# EAGLE board oledboard2 (EAGLE 6.5.0)
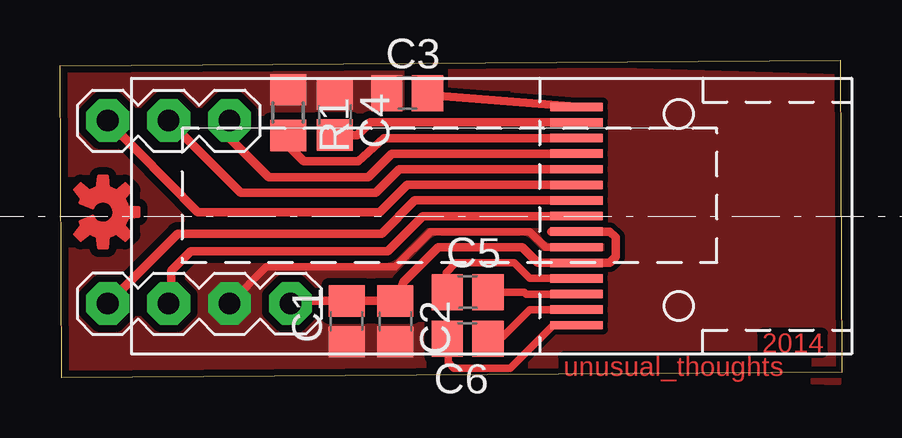
[diagram p0: board, top side]

Size 32.58 x 13.24 mm. Coordinates in mm from the lower left corner, seen from the top.
Outline: 0,13 32.5,13.24 32.58,0.24 0.08,0 0,13
Copper layers (1*16): Top 0.035mm / dielectric 1.5mm / Bottom 0.035mm
Design rules "default *": minimum track width 14mil, minimum drill 24mil, track to track 8mil, track to pad 8mil, pad to pad 8mil, via to via 8mil, smd to smd 8mil, copper to edge 10mil, drill to drill 8mil, minimum pad ring 10mil, minimum via ring 8mil, stop-mask expansion 4mil, vias tented up to drill 0mil, thermal gap 10mil

## Footprints (pad centres in the part's own frame; a part is rotated, then mirrored left to right if it is on the bottom)
C0805 = smd 1.3 x 1.5: 1 -0.85,0; 2 0.85,0
R0805 = smd 1.3 x 1.5: 1 -0.95,0; 2 0.95,0
UG-2832HSWEG04 = smd 2.2 x 0.35: 1 1.535,-4.55; 2 1.535,-3.9; 3 1.535,-3.25; 4 1.535,-2.6; 5 1.535,-1.95; 6 1.535,-1.3; 7 1.535,-0.65; 8 1.535,0; 9 1.535,0.65; 10 1.535,1.3; 11 1.535,1.95; 12 1.535,2.6; 13 1.535,3.25; 14 1.535,3.9; 15 1.535,4.55
CONNECTOR = drill 0.9 pad 1.778 octagon: 1 -2.54,-3.81; 2 -5.08,-3.81; 3 -5.08,3.81; 4 0,-3.81; 5 -2.54,3.81; 6 0,3.81; 7 2.54,-3.81

## Placement (x,y rotation side)
C1  1 uF  [C0805]  11.94,2.36 90 top
C2  1 uF  [C0805]  13.97,2.36 270 top
C3  2.2 uF  [C0805]  14.46,11.86 0 top
C4  2.2 uF  [C0805]  11.46,10.97 270 top
C5  1 uF  [C0805]  16.98,3.58 0 top
C6  1 uF  [C0805]  16.98,1.62 180 top
LOGO1  OSHW.SYMS  [OSHW-LOGO-S]  1.79,6.91 270 top
R1  3.3K  [R0805]  9.51,11.05 270 top
U$1  UG-2832HSWEG04  [UG-2832HSWEG04]  19.99,6.74 0 top
U$6  CONNECTOR  [CONNECTOR]  7.07,6.91 0 top

## Library data of the parts
C1-C6 = resistor
LOGO1 U$1 U$6 = OLED
R1 = rcl

## Nets
3.3V: C1.2 C2.1 U$1.5 U$1.7 U$6.7
GND: C1.1 C2.2 C3.1 C4.1 R1.1 U$1.6 U$6.4
N$1: C5.1 U$1.4
N$2: C5.2 U$1.3
N$3: C6.1 U$1.2
N$4: C6.2 U$1.1
N$5: R1.2 U$1.13
N$6: U$1.8 U$6.1
N$7: C3.2 U$1.15
N$8: C4.2 U$1.14
N$9: U$1.9 U$6.2
N$10: U$1.10 U$6.3
N$11: U$1.11 U$6.5
N$12: U$1.12 U$6.6

## Tracks (layer width: path | path; a pad name or v marks a point on that pad's centre or on a via)
3.3V
  Top 0.356: 20.47,6.09 U$1.7 22.91,6.09 23.16,5.85 23.16,5.04 22.91,4.79 U$1.5 19.91,4.79 19.26,5.44 15.76,5.44 14.3,3.98 C2.1 C1.2 9.72,3.21 U$6.7
GND
  Top 0.305: U$1.6 20.23,5.44 19.58,6.09 15.44,6.09 13.97,4.63 8.6,4.63 U$6.4
  pour Top (isolate 0.305, no thermals): -0.08,0.33 20.64,-0.16 28.76,-0.24 32.5,-0.16 32.5,12.68 0,13
N$1
  Top 0.305: U$1.4 19.58,4.14 18.93,4.79 16.49,4.79 16.09,4.39 16.09,3.62 C5.1
N$2
  Top 0.305: C5.2 19.34,3.57 19.42,3.49 U$1.3
N$3
  Top 0.305: U$1.2 19.58,2.84 18.44,1.71 17.91,1.71 C6.1
N$4
  Top 0.305: U$1.1 20.56,2.19 18.77,0.41 16.41,0.41 16.17,0.65 16.17,1.59 C6.2
N$5
  Top 0.356: U$1.13 13.49,9.99 12.43,9.02 10.16,9.02 9.34,9.83 R1.2
N$6
  Top 0.356: U$6.1 4.63,3.17 4.63,4.46 5.46,5.28 13.65,5.28 15.11,6.74 U$1.8
N$7
  Top 0.356: C3.2 15.47,11.78 U$1.15
N$8
  Top 0.356: C4.2 11.46,10.16 11.49,10.12 12.39,10.12 12.92,10.64 U$1.14
N$9
  Top 0.356: U$6.2 4.9,6.01 13.41,6.01 14.79,7.39 U$1.9
N$10
  Top 0.356: U$6.3 5.74,6.91 13.32,6.91 14.46,8.04 U$1.10
N$11
  Top 0.356: U$6.5 7.53,7.72 13.16,7.72 14.14,8.69 U$1.11
N$12
  Top 0.356: U$1.12 13.81,9.34 12.84,8.37 8.69,8.37 7.09,9.97 U$6.6
N$13
  pour Top (no thermals): 32.5,12.51 15.52,13 15.52,12.11 18.93,12.11 18.93,11.94 22.51,11.46 22.51,2.11 20.47,2.19 19.99,1.62 19.66,1.46 19.66,0.33 32.42,-0.16

## Text on the board
Top: 2014 | unusual_thoughts